# Altium PCB SixPak Ultra.PcbDoc (part 3 of 3)
Units mil, origin at the board's own origin, x right, y up, seen from the top; angles counter-clockwise.
Board outline 13094.87 x 4169.06 mil, 4 copper layers (Top Copper, GND, Signal Layer 2, Bottom Copper), stack 46.063 mil thick; 195 components, 300 nets, 1442 pads, 116 vias.
Unrouted connection lines stored in the file: 618.
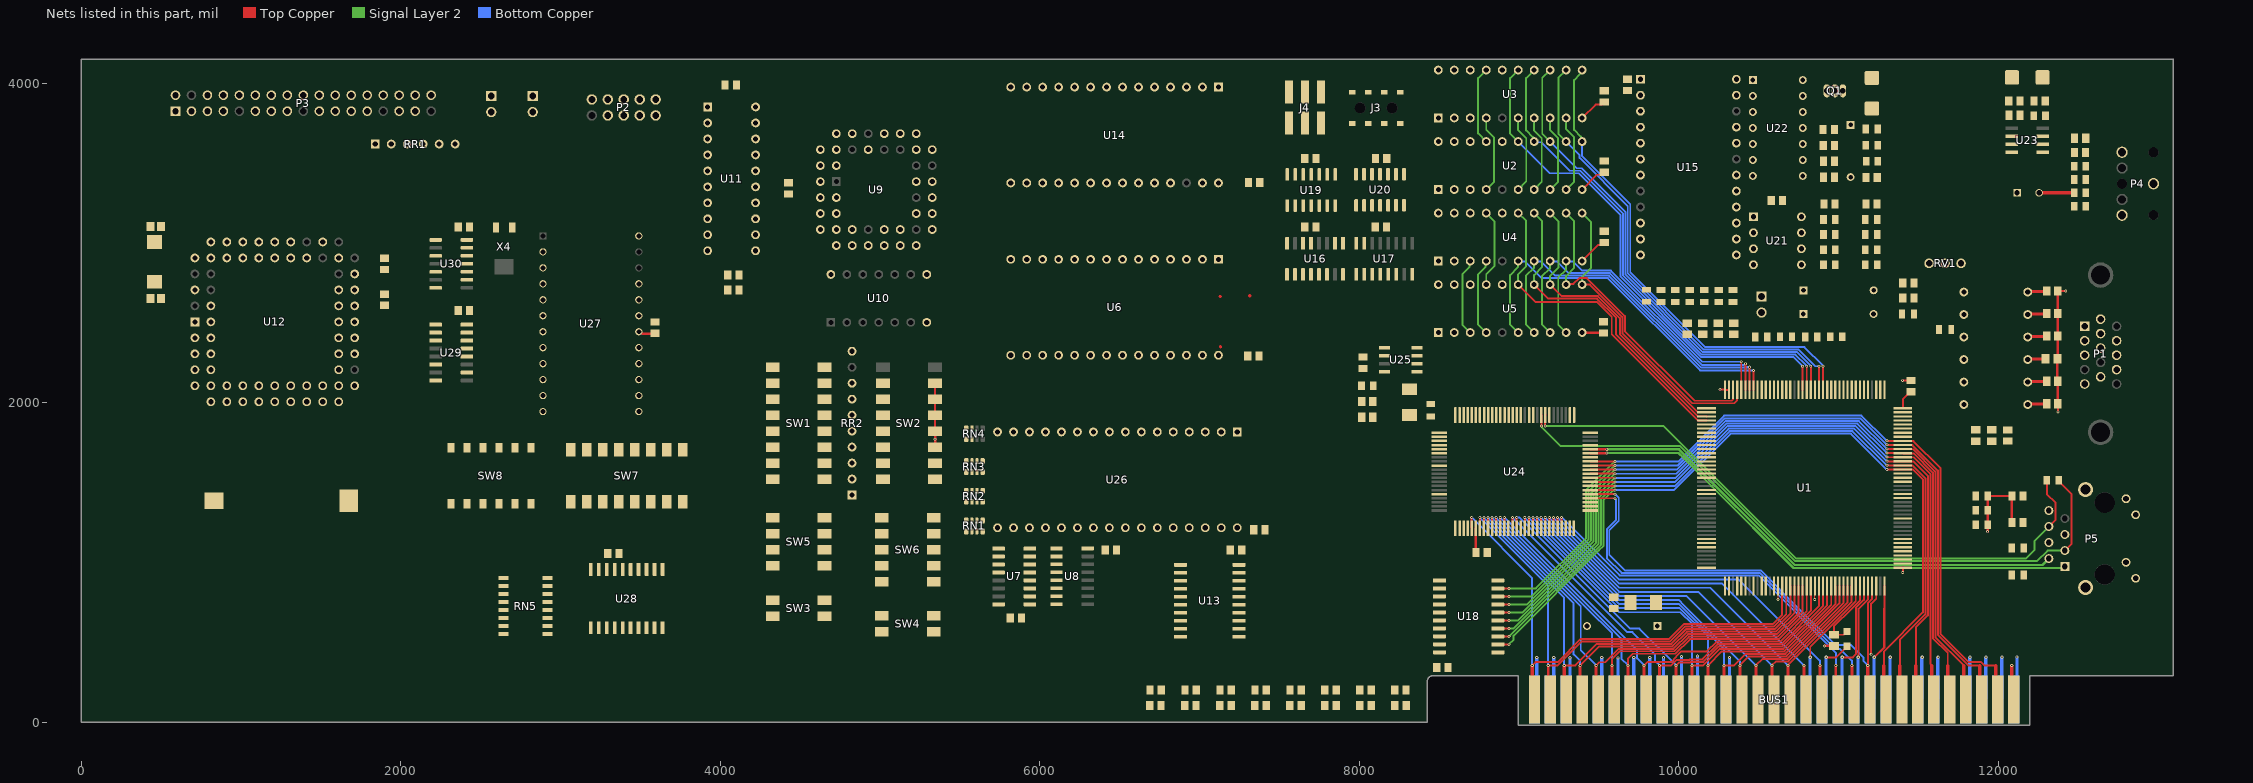
[diagram p4: the nets of this part, all layers, seen from the top]

## Via types
v1: diameter 18, hole 7.9, Top Copper to Bottom Copper, 70 vias
v2: diameter 20, hole 7.9, Top Copper to Bottom Copper, 46 vias

## Nets (pads, with @x,y where several pads share a name; then routed paths per layer and width w, separated by ;. In a path a pad name is that pad's centre, name@x,y a point inside that pad or via, vN(x,y) a via of type N, cw(c..) or ccw(c..) an arc to the next point about the centre after c; other vN are vias at no path point) (continued)
TP_TX_N: (continued)
  Signal Layer 2 w15: v1(9548.7,1707.11) 10000.7,1707.11 10724.51,983.3 12274.96,983.3 P5.R2@12315.48,1023.82
TP_TX_P: P5.R1 U24.45 | length 3273
  Top Copper w15: U24.45@9444.7,1682.82 9546.59,1682.82 9547.89,1684.11 v1(9548.7,1684.11)
  Signal Layer 2 w15: v1(9548.7,1684.11) 9997.54,1684.11 10029.56,1652.09 10205.33,1476.33 10716.85,964.8 12406.46,964.8 P5.R1@12415.48,973.82
TRK00: P3.26 RR1.3 U12.2
TX: P2.5 U11.6
UART_IRQ: SW1.1.1 SW1.2.1 SW1.3.1 SW1.4.1 U9.33
VBAT: BT1.POS U27.20
VCC: BUS1.3 BUS1.29 C1.1 C2.1 C3.1 C4.1 C5.1 C6.1 C7.1 C8.1 C9.1 C10.1 C37.1 CD1.1 CD2.1 CD3.1 CD4.1 CD5.1 CD6.1 CD7.1 CD8.1 CD9.1 CD10.1 CD11.1 CD12.1 CD13.1 CD14.1 CD15.1 CD16.1 CD17.1 CD18.1 CD19.1 CD20.1 CD21.1 CD22.1 CD23.1 CD24.1 CD25.1 CD27.1 CD28.1 CD29.1 CD32.1 J2.1 L1.2 L2.2 P5.L1 P5.L4 R6.1 R10.2 R17.1 RR1.1 RR2.1 SW3.3 SW3.4 SW4.3 SW4.4 SW5.5 SW5.6 SW5.7 SW5.8 SW6.6 SW6.7 SW6.8 SW6.9 SW6.10 SW7.1 SW7.2 SW7.3 SW7.4 SW7.5 SW7.6 SW7.7 SW7.8 U1.8 U1.19 U1.22 U1.40 U1.51 U1.62 U1.69 U1.81 U1.120 U1.130 U1.134 U2.10 U3.10 U4.10 U5.10 U6.1 U6.28 U7.16 U8.6 U8.16 U9.14 U9.15 U9.44 U10.14 U11.11 U12.18 U12.27 U12.39 U12.40 U12.46 U12.60 U12.68 U13.3 U13.5 U13.20 U14.28 U15.1 U16.16 U17.16 U18.20 U19.14 U20.1 U20.4 U20.10 U20.13 U20.14 U21.1 U22.11 U24.6 U24.17 U24.47 U24.57 U24.70 U24.89 U25.6 U25.8 U26.32 U27.18 U27.24 U28.20 U29.16 U30.14 | length 1712.7
  Top Copper w5: v1(10620,768) 10620.25,768.25 10620.25,851.35 U1.134@10620.5,851.6
  Top Copper w12: U4.10@9393.96,2885.83 9395.83,2885.83 9402.5,2892.5 9402.5,2894.38 9494.54,2986.42 9517.15,2986.42 CD7.1@9532.29,3001.55 ; U2.10@9393.96,3333.48 9486.34,3425.86 9517.15,3425.86 CD9.1@9532.29,3441 ; U3.10@9393.96,3781.14 9478.13,3865.31 9517.15,3865.31 CD8.1@9532.29,3880.44 ; U1.40@11401,1964.8 11401,2021.47 11447.09,2067.57 CD5.1@11453,2067.57
  Top Copper w15: U27.18@3490.03,2443.31 3498.12,2443.31 3510.54,2430.89 CD24.1@3591.19,2430.89 ; CD22.1@4427.12,3375.63 CD22.1@4427.88,3376.39 ; CD17.1@8728.17,1062.9 U24.6@8728.17,1213.33 ; U5.10@9393.96,2438.18 9525.21,2438.18 CD6.1@9528.3,2435.1
  Top Copper w20: 7127.82,2663.34 7129.25,2664.77 ; 7130.27,2349.48 7131.38,2350.59 ; CD10.1@7300.2,2289.72 CD10.1@7301.3,2290.82 ; 7314.11,2668.43 7315.54,2669.86
  Bottom Copper w20: BUS1.29@9305,135 9318.43,148.43 v2(9318.43,402.37) ; BUS1.3@11905,135 11920,150 11920,403.5 v2(11922.3,405.8)
VSS: BUS1.7 C50.2 C51.2 C53.2 U11.10 U22.7 | length 277.9
  Bottom Copper w20: BUS1.7@11505,135 11520,150 11520,403.63 v2(11522.17,405.8)
VSYNC: FB6.2 U1.47
WDATA: P3.22 U12.53
WE: P3.24 U12.52
WP: P3.28 RR1.4 U12.1
pads on no net: BUS1.5 BUS1.8 BUS1.15 BUS1.16 BUS1.17 BUS1.18 BUS1.20 BUS1.28 J3.MH1 J3.MH2 P1.4 P1.9 P1.11 P1.15 P1.Un1 P1.Un2 P2.10 P3.4 P3.9 P3.17 P3.27 P3.33 P4.3 P4.4 P4.Un1 P4.Un2 P4.Un3 P5. P5.R7 RN4.3 RN4.4 RN4.5 RN4.6 RR2.9 SW2.8 SW2.8.1 U1.9 U1.10 U1.11 U1.12 U1.14 U1.15 U1.16 U1.17 U1.20 U1.21 U1.44 U1.63 U1.99 U1.100 U1.103 U1.104 U1.105 U1.106 U1.107 U1.108 U1.109 U1.110 U1.111 U1.112 U1.116 U1.117 U1.118 U1.119 U1.123 U1.127 U1.129 U1.132 U1.159 U2.5 U3.5 U4.5 U5.5 U7.13 U7.14 U7.15 U8.9 U8.10 U8.11 U8.12 U8.13 U8.14 U8.15 U9.1 U9.12 U9.19 U9.23 U9.26 U9.27 U9.32 U9.34 U9.35 U9.38 U10.1 U10.2 U10.3 U10.4 U10.5 U10.6 U10.9 U10.10 U10.11 U10.12 U10.13 U12.29 U12.42 U12.43 U12.44 U12.47 U12.48 U12.63 U12.64 U12.66 U12.67 U14.26 U15.8 U15.9 U15.19 U15.22 U16.7 U16.11 U16.12 U16.15 U17.7 U17.9 U17.10 U17.11 U17.12 U17.13 U17.14 U23.1 U23.8 U24.48 U24.49 U24.53 U24.54 U24.55 U24.56 U24.60 U24.63 U24.87 U24.88 U24.90 U24.91 U24.92 U24.93 U24.94 U24.95 U24.97 U24.98 U24.99 U24.100 U25.7 U27.1 U27.22 U27.23 U29.4 U29.5 U29.7 U29.9 U29.11 U30.2 U30.4 U30.6 U30.8 X4.S1

## Polygon pours and split planes (outlines as drawn)
VCC on Signal Layer 2 "NONET_L-01_P-001" (solid, pour order 0): 8419.71,297.44 8419.71,4.31 8419.7,4.3 8419,5 4.9,5 4.9,299.5 5,4144.4 13089.9,4144.4 13089.9,296.3 13086.7,296.3
GND on GND (split plane): 13074.77,311.43 12194.9,311.43 12190.98,311.05 12187.21,309.9 12183.73,308.05 12180.69,305.55 12178.19,302.5 12176.33,299.03 12175.19,295.26 12174.8,291.34 12174.8,0.44 9015.1,0.44 9015.1,291.34 9014.71,295.26 9013.57,299.03 9011.71,302.5 9009.21,305.55 9006.17,308.05 9002.69,309.9 8998.92,311.05 8995,311.43 8461.78,311.43 8461.6,311.42 8455.43,311.07 8449.16,310 8443.06,308.24 8437.18,305.81 8431.62,302.74 8426.43,299.06 8421.69,294.82 8417.46,290.08 8413.78,284.9 8410.7,279.33 8408.27,273.46 8406.51,267.35 8405.44,261.08 8405.1,254.92 8405.08,254.73 8405.08,20.1 20.1,20.1 20.1,4129.3 13074.77,4129.3

## Keep-outs
Keep-Out Layer:
  lines w10: 13094.87,291.34 12194.9,291.34 12194.9,-19.66 8995,-19.66 8995,291.3 8461.78,291.34 ccw(c8461.78,254.73) 8425.18,254.73 8425.18,0.01 ; 13094.87,291.34 13094.87,4149.02 13094.48,4149.4 0,4149.4 0,0 8425.19,0 ; 8425.18,0.01 8425.19,0

## Text inside footprints (layer, text, board x,y; h text height)
J3: Top Overlay "8" at 8341.52,3916.74 h77.5; Top Overlay "2" at 7838.64,3916.74 h77.5; Top Overlay "7" at 8341.52,3721.7 h77.5; Top Overlay "1" at 7838.64,3721.7 h77.5; Mechanical 30 "4.953" at 7701.52,3839.22 h15.5; Mechanical 30 "5.080" at 7634.04,3839.22 h15.5; Mechanical 30 "2.476" at 7794.04,3666.74 h15.5; Mechanical 30 "1.270" at 7804.04,4061.7 h15.5; Mechanical 30 "2.540" at 7851.52,4101.7 h15.5; Mechanical 30 "5.080" at 8079.04,3616.74 h15.5; Mechanical 30 "7.620" at 8079.04,4139.22 h15.5; Mechanical 30 "10.160" at 8073.52,4089.22 h15.5; Mechanical 30 "3.683" at 8309.04,3936.74 h15.5; Mechanical 30 "1.270" at 8334.04,4024.22 h15.5; Mechanical 3 "1" at 7838.64,3721.7 h77.5; Mechanical 3 "2" at 7838.64,3916.74 h77.5; Mechanical 3 "7" at 8341.52,3721.7 h77.5; Mechanical 3 "8" at 8341.52,3916.74 h77.5
P2: Top Overlay "1" at 3660,3881 h50; Mechanical 13 "1" at 3671,3922.06 h50 r180; Mechanical 13 "10" at 3139.7,3826 h50 r180
SW1: Top Overlay "ON" at 4609.34,2341.4 h50.07
SW2: Top Overlay "ON" at 4967.34,2341.4 h50.07
U1: Top Overlay "121" at 10219.52,892.7 h40 r270; Top Overlay "41" at 11315.52,2162.7 h40 r270; Top Overlay "1" at 11467.69,894.43 h40; Top Overlay "81" at 10106.52,2043.7 h40 r270